# Altium PCB PCB2.0.PcbDoc (part 4 of 4)
Units mm, origin at the board's own origin, x right, y up, seen from the top; angles counter-clockwise.
Board outline 152.4 x 101.6 mm, 4 copper layers (Top Layer, Mid-Layer 1, Mid-Layer 2, Bottom Layer); 254 components, 501 nets, 1699 pads, 910 vias.
Unrouted connection lines stored in the file: 81.
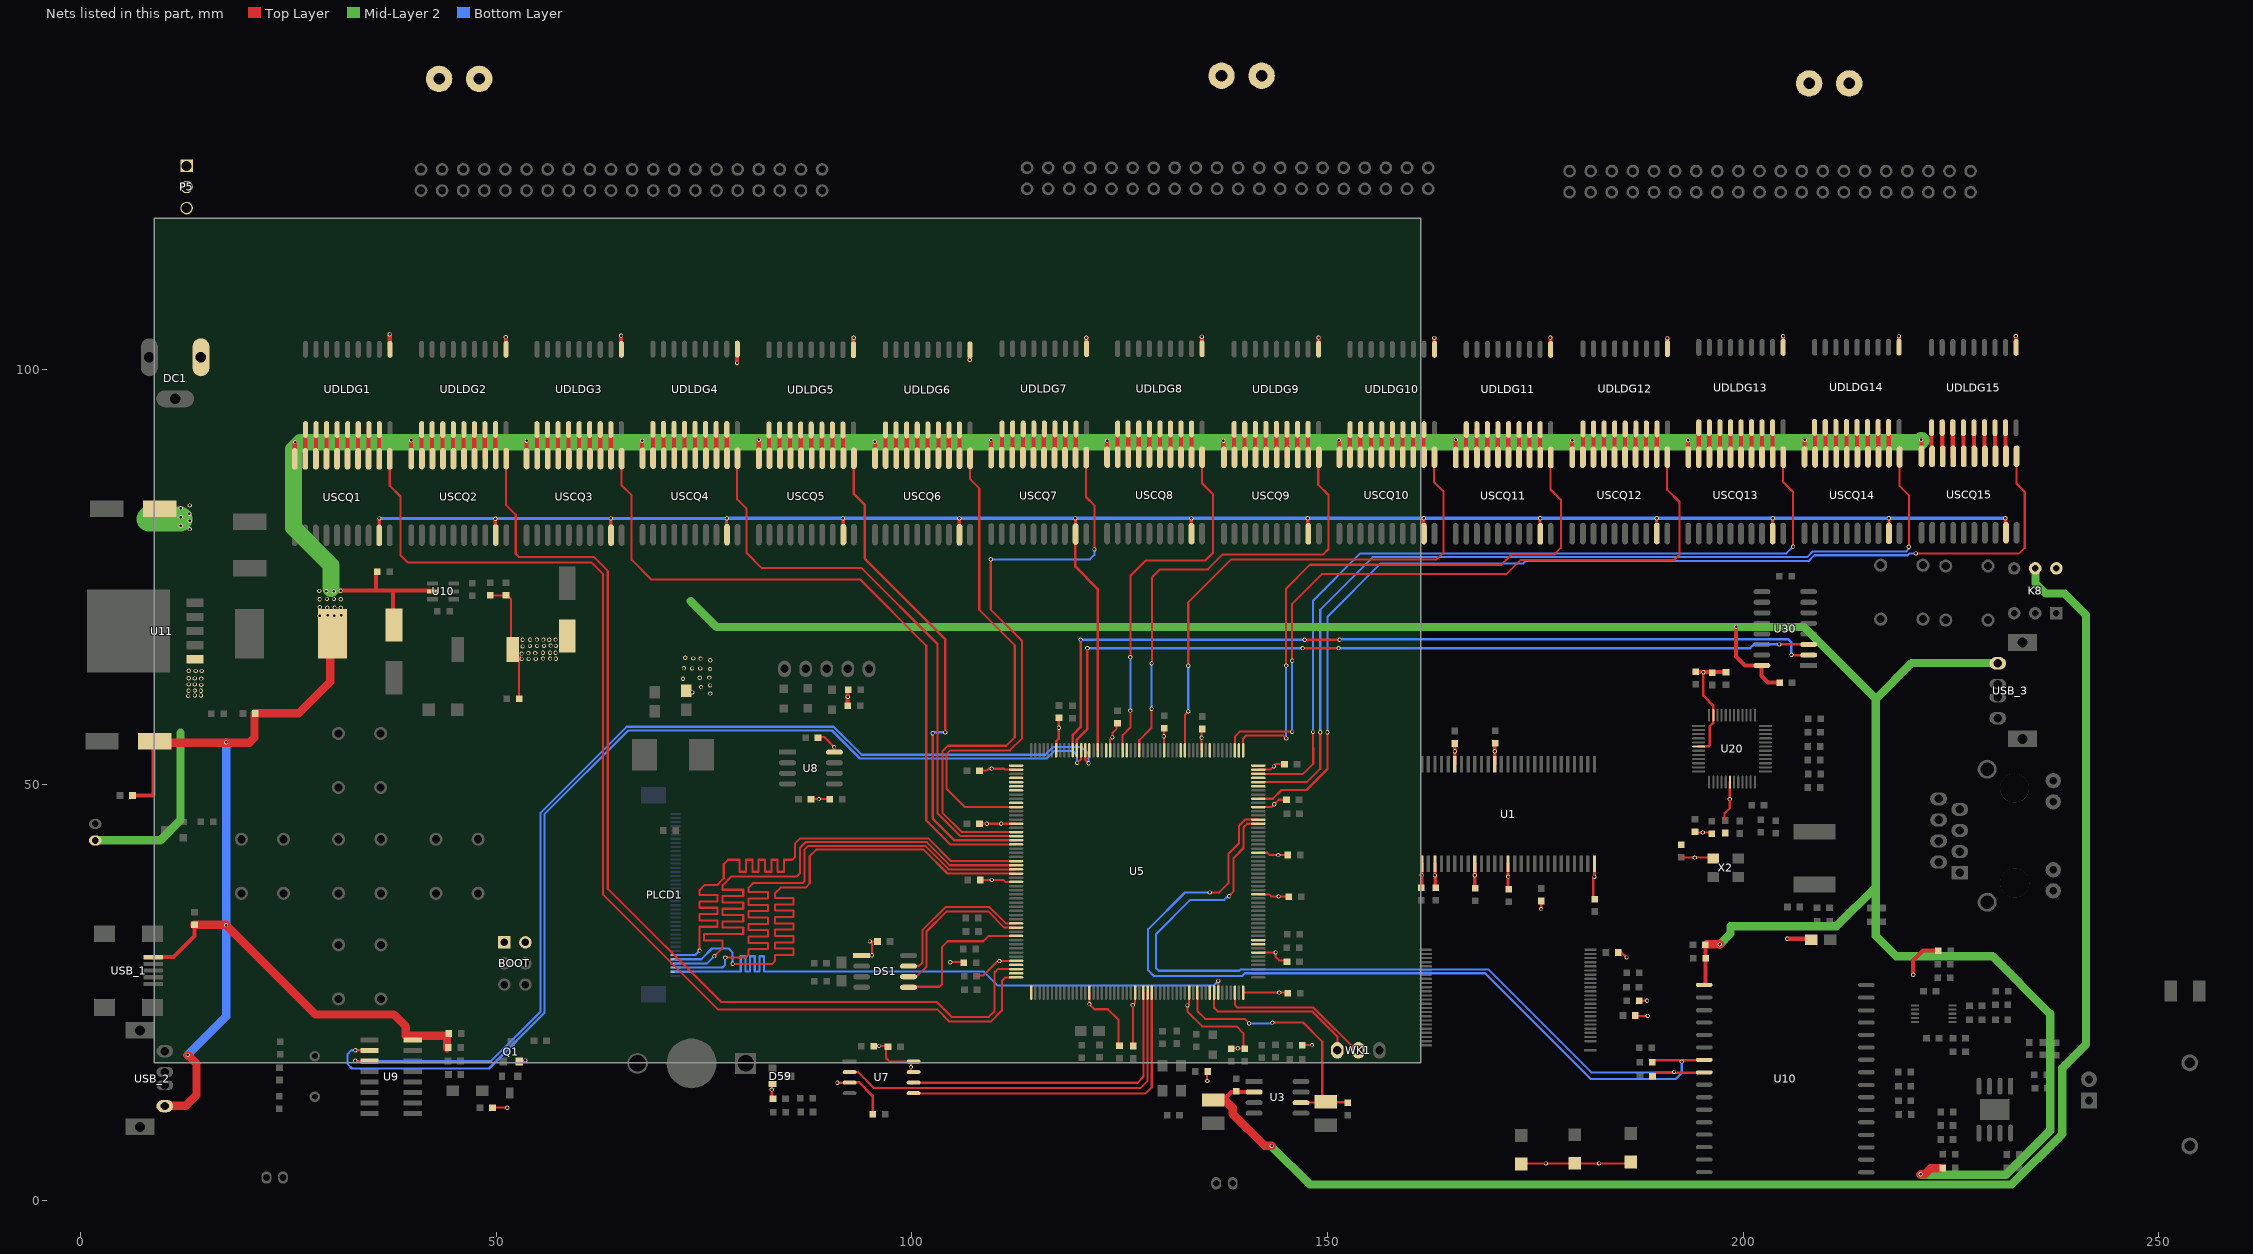
[diagram p6: the nets of this part, all layers, seen from the top]

## Via types
v1: diameter 0.5, hole 0.3, Top Layer to Bottom Layer, 910 vias

## Nets (pads, with @x,y where several pads share a name; then routed paths per layer and width w, separated by ;. In a path a pad name is that pad's centre, name@x,y a point inside that pad or via, vN(x,y) a via of type N, cw(c..) or ccw(c..) an arc to the next point about the centre after c; other vN are vias at no path point) (continued)
SCQ_D8: U5.140 USCQ1.9 USCQ2.9 USCQ3.9 USCQ4.9 USCQ5.9 USCQ6.9 USCQ7.9 USCQ8.9 USCQ9.9 USCQ10.9 USCQ11.9 USCQ12.9 USCQ13.9 USCQ14.9 USCQ15.9 | length 252.3
  Top Layer w0.3: USCQ7.9@119.67,80.1 119.67,76.255 122.35,73.575 122.35,55.082 122.353,55.079 122.353,54.149 U5.140@122.351,54.147
  Top Layer w0.4: USCQ1.9@35.895,80.1 v1@35.895,82.045 ; USCQ2.9@49.87,80.1 49.87,82.045 v1@49.875,82.05 ; USCQ3.9@63.77,80.1 v1@63.77,82.08 ; USCQ4.9@77.695,80.1 v1@77.695,82.07 ; USCQ5.9@91.72,80.1 v1@91.72,82.055 ; USCQ6.9@105.695,80.1 v1@105.695,82.07 ; USCQ7.9@119.67,80.1 v1@119.67,82.07 ; USCQ8.9@133.62,80.1 v1@133.62,82.095 ; USCQ9.9@147.62,80.1 v1@147.62,82.045 ; USCQ10.9@161.545,80.1 v1@161.545,82.07 ; USCQ11.9@175.57,80.1 v1@175.57,82.095 ; USCQ12.9@189.595,80.1 v1@189.595,82.07 ; USCQ13.9@203.545,80.125 v1@203.545,82.095 ; USCQ14.9@217.57,80.125 v1@217.57,82.055 ; USCQ15.9@231.62,80.125 v1@231.62,82.145
  Bottom Layer w0.4: v1@35.9,82.05 v1(35.925,82.05) v1@77.7,82.05 ; v1(77.725,82.05) v1@77.7,82.05 ; v1(231.55,82.075) v1(203.575,82.075) v1(189.625,82.075) v1(175.575,82.075) v1(161.575,82.075) v1(147.625,82.075) 77.725,82.075 v1@77.7,82.05
  other v1: 49.875,82.025 63.775,82.05 91.7,82.05 105.7,82.05 119.675,82.05 133.625,82.05 217.55,82.075
SCQ_LE1: U5.208 USCQ1.11 | length 136.4
  Top Layer w0.254: USCQ1.11@37.165,89.3 37.165,85.985 38.45,84.7 38.45,77.625 39.3,76.775 61.4,76.775 62.844,75.331 62.844,36.775 76.64,22.979 103.046,22.979 104.525,21.5 109.475,21.5 110.831,22.856 110.831,26.437 111.217,26.822 U5.208@112.526,26.822
SCQ_LE2: U5.206 USCQ2.11 | length 122.8
  Top Layer w0.254: USCQ2.11@51.14,89.3 51.14,83.685 52.325,82.5 52.325,77.775 52.675,77.425 61.725,77.425 63.4,75.75 63.4,37.498 77.015,23.883 102.95,23.883 104.758,22.075 109.25,22.075 109.927,22.752 109.927,27.412 110.337,27.822 U5.206@112.526,27.822
SCQ_LE3: U5.176 USCQ3.11 | length 85.5
  Top Layer w0.254: USCQ3.11@65.04,89.3 65.04,86.085 66.275,84.85 66.275,77.075 68.65,74.7 93.775,74.7 101.725,66.75 101.725,45.7 104.603,42.822 U5.176@112.526,42.822
SCQ_LE4: U5.174 USCQ4.11 | length 70.3
  Top Layer w0.254: USCQ4.11@78.965,89.3 78.965,84.36 80.1,83.225 80.1,77.9 81.925,76.075 93.95,76.075 103.079,66.946 103.079,46.579 105.836,43.822 U5.174@112.526,43.822
SCQ_LE5: U5.104
SCQ_LE6: U5.157 U5.173 USCQ6.11 | length 62.4
  Top Layer w0.254: USCQ6.11@106.965,89.3 106.965,86.81 108.1,85.675 108.1,71.05 112.375,66.775 112.375,55.725 111.35,54.7 104.325,54.7 103.698,54.073 103.698,46.6 105.975,44.322 U5.173@112.526,44.322
SCQ_LE7: U5.167 USCQ7.11 | length 71.3
  Top Layer w0.254: v1(109.475,77.15) 109.475,71.075 113.25,67.3 113.25,55.625 111.775,54.15 104.625,54.15 104.15,53.675 104.15,49.547 106.375,47.322 U5.167@112.526,47.322 ; USCQ7.11@120.94,89.3 120.94,84.635 121.95,83.625 v1(121.95,78.325) v1@121.95,78.225
  Bottom Layer w0.254: v1@109.45,77.1 109.475,77.125 121.4,77.125 121.95,77.675 v1(121.95,78.325)
SCQ_LE8: U5.134 USCQ8.11 | length 44.4
  Top Layer w0.254: U5.134@125.351,54.147 125.351,55.974 126.275,56.898 v1(126.275,58.937) ; v1(126.275,65.362) 126.275,75.125 128.15,77 135.3,77 136.225,77.925 136.225,84.975 134.89,86.31 USCQ8.11@134.89,89.3
  Bottom Layer w0.254: v1(126.275,58.937) v1(126.275,65.362)
SCQ_LE9: U5.130 USCQ9.11 | length 55.5
  Top Layer w0.254: U5.130@127.351,54.147 127.351,55.377 128.825,56.851 v1(128.825,59.162) ; v1(128.825,64.612) 128.825,64.625 128.875,64.675 128.875,74.95 129.85,75.925 135.6,75.925 137.4,77.725 149.475,77.725 150.125,78.375 150.125,84.875 148.89,86.11 USCQ9.11@148.89,89.3
  Bottom Layer w0.254: v1(128.825,59.162) v1(128.825,64.612)
SCQ_LE10: U5.119 USCQ10.11 | length 63
  Top Layer w0.254: U5.119@132.851,54.147 132.851,58.438 v1(133.25,58.837) ; v1(133.25,64.337) 133.25,71.95 138.425,77.125 163.125,77.125 163.975,77.975 163.975,85.25 162.815,86.41 USCQ10.11@162.815,89.3
  Bottom Layer w0.254: v1(133.25,58.837) v1(133.25,64.337)
SCQ_LE11: U5.105 USCQ11.11 | length 71.3
  Top Layer w0.254: U5.105@139.851,54.147 139.851,55.569 140.225,55.943 144.675,55.943 v1(145.031,55.587) ; v1(145.031,64.356) 145.031,73.631 147.875,76.475 170.925,76.475 172.15,77.7 177.25,77.7 178.075,78.525 178.075,84.3 176.84,85.535 USCQ11.11@176.84,89.3
  Bottom Layer w0.254: v1(145.031,55.587) v1(145.031,64.356)
SCQ_LE12: U5.107 USCQ12.11 | length 85.5
  Top Layer w0.254: U5.107@138.851,54.147 138.851,55.801 139.445,56.395 145.73,56.395 v1(145.75,56.375) ; v1(145.75,64.925) 145.75,71.775 149.325,75.35 171.525,75.35 173.25,77.075 191.75,77.075 192.35,77.675 192.35,84.025 190.865,85.51 USCQ12.11@190.865,89.3
  Bottom Layer w0.254: v1(145.75,56.375) v1(145.75,64.925)
SCQ_LE13: U5.102 USCQ13.11 | length 98.7
  Top Layer w0.254: U5.102@141.686,51.312 U5.102@141.676,51.322 147.072,51.322 148.287,52.537 148.287,54.412 148.275,54.425 v1(148.275,56.375) ; USCQ13.11@204.815,89.325 204.815,86.485 206,85.3 206,78.5 206.025,78.525 v1(206.025,78.675)
  Bottom Layer w0.254: v1(148.275,56.375) 148.275,72.175 153.95,77.85 205.2,77.85 v1(206.025,78.675)
SCQ_LE14: U5.100 USCQ14.11 | length 112.5
  Top Layer w0.254: U5.100@141.676,50.322 147.522,50.322 149.125,51.925 v1(149.125,56.325) ; USCQ14.11@218.84,89.325 218.84,85.935 219.95,84.825 v1@219.95,78.675
  Bottom Layer w0.254: v1(149.125,56.325) 149.125,71.075 155.448,77.398 207.723,77.398 208.4,78.075 219.625,78.075 219.95,78.4 v1(219.95,78.65)
SCQ_LE15: U5.96 USCQ15.11 | length 126.8
  Top Layer w0.254: U5.96@141.676,48.322 143.41,48.322 144.458,49.37 147.47,49.37 150,51.9 v1(150,56.325) ; v1(220.8,77.85) 233.225,77.85 233.9,78.525 233.9,85.25 232.89,86.26 USCQ15.11@232.89,89.325
  Bottom Layer w0.254: v1(150,56.325) 150,70.225 156.425,76.65 173.55,76.65 173.825,76.925 207.889,76.925 208.587,77.623 219.812,77.623 220.014,77.825 220.166,77.825 220.177,77.814 220.836,77.814 220.872,77.85 v1(220.8,77.85)
SCQ_LE16: U5.1
SCQ_LE17: U5.207
SCQ_LE18: U5.205
SCQ_LE19: U5.175 USCQ5.11 | length 60.6
  Top Layer w0.3: USCQ5.11@93.015,89.3 93.015,85.01 94.3,83.725 94.3,77.225 104,67.525 v1(104,56.3) v1@104,56.2 ; v1@102.475,56.225 v1(102.475,56.2) 102.475,45.95 105.103,43.322 U5.175@112.526,43.322
  Bottom Layer w0.3: v1(102.475,56.2) 102.575,56.3 v1(104,56.3)
SCQ_LE21: U5.160
SCQ_LE22: U5.142
SCQ_LE23: U5.138
SCQ_LE24: U5.133
SCQ_LE25: U5.120
SCQ_LE26: U5.113
SCQ_LE27: U5.106
SCQ_LE29: U5.101
SCQ_LE30: U5.99
SCQ_Q1: UDLDG1.1 USCQ1.19 | length 3.4
  Top Layer w0.5: USCQ1.19@27.005,89.3 27,89.305 27,92.7 UDLDG1.1@27.005,92.695
SCQ_Q2: UDLDG1.2 USCQ1.18 | length 3.4
  Top Layer w0.5: USCQ1.18@28.27,89.305 UDLDG1.2@28.27,92.7
SCQ_Q3: UDLDG1.3 USCQ1.17 | length 3.4
  Top Layer w0.5: USCQ1.17@29.54,89.305 UDLDG1.3@29.54,92.7
SCQ_Q4: UDLDG1.4 USCQ1.16 | length 3.4
  Top Layer w0.5: USCQ1.16@30.81,89.305 UDLDG1.4@30.81,92.7
SCQ_Q5: UDLDG1.5 USCQ1.15 | length 3.4
  Top Layer w0.5: USCQ1.15@32.08,89.305 UDLDG1.5@32.08,92.7
SCQ_Q6: UDLDG1.6 USCQ1.14 | length 3.4
  Top Layer w0.5: USCQ1.14@33.35,89.305 UDLDG1.6@33.35,92.7
SCQ_Q7: UDLDG1.7 USCQ1.13 | length 3.4
  Top Layer w0.5: USCQ1.13@34.62,89.305 UDLDG1.7@34.62,92.7
SCQ_Q8: UDLDG1.8 USCQ1.12 | length 3.4
  Top Layer w0.5: USCQ1.12@35.89,89.305 UDLDG1.8@35.89,92.7
SCQ_Q9: UDLDG2.1 USCQ2.19 | length 3.4
  Top Layer w0.5: USCQ2.19@40.975,89.305 UDLDG2.1@40.975,92.675
SCQ_Q10: UDLDG2.2 USCQ2.18 | length 3.4
  Top Layer w0.5: USCQ2.18@42.245,89.305 UDLDG2.2@42.245,92.675
SCQ_Q11: UDLDG2.3 USCQ2.17 | length 3.4
  Top Layer w0.5: USCQ2.17@43.515,89.305 UDLDG2.3@43.515,92.675
SCQ_Q12: UDLDG2.4 USCQ2.16 | length 3.4
  Top Layer w0.5: USCQ2.16@44.785,89.305 UDLDG2.4@44.785,92.675
SCQ_Q13: UDLDG2.5 USCQ2.15 | length 3.4
  Top Layer w0.5: USCQ2.15@46.055,89.305 UDLDG2.5@46.055,92.675
SCQ_Q14: UDLDG2.6 USCQ2.14 | length 3.4
  Top Layer w0.5: USCQ2.14@47.325,89.305 UDLDG2.6@47.325,92.675
SCQ_Q15: UDLDG2.7 USCQ2.13 | length 3.4
  Top Layer w0.5: USCQ2.13@48.6,89.3 48.595,89.305 48.595,92.675 UDLDG2.7@48.6,92.67
SCQ_Q16: UDLDG2.8 USCQ2.12 | length 3.4
  Top Layer w0.5: USCQ2.12@49.865,89.305 UDLDG2.8@49.865,92.675
SCQ_Q17: UDLDG3.1 USCQ3.19 | length 3.4
  Top Layer w0.5: USCQ3.19@54.875,89.305 UDLDG3.1@54.875,92.7
SCQ_Q18: UDLDG3.2 USCQ3.18 | length 3.4
  Top Layer w0.5: USCQ3.18@56.145,89.305 UDLDG3.2@56.145,92.7
SCQ_Q19: UDLDG3.3 USCQ3.17 | length 3.4
  Top Layer w0.5: USCQ3.17@57.415,89.305 UDLDG3.3@57.415,92.7
SCQ_Q20: UDLDG3.4 USCQ3.16 | length 3.4
  Top Layer w0.5: USCQ3.16@58.685,89.305 UDLDG3.4@58.685,92.7
SCQ_Q21: UDLDG3.5 USCQ3.15 | length 3.4
  Top Layer w0.5: USCQ3.15@59.955,89.305 UDLDG3.5@59.955,92.7
SCQ_Q22: UDLDG3.6 USCQ3.14 | length 3.4
  Top Layer w0.5: USCQ3.14@61.225,89.305 UDLDG3.6@61.225,92.7
SCQ_Q23: UDLDG3.7 USCQ3.13 | length 3.4
  Top Layer w0.5: USCQ3.13@62.495,89.305 UDLDG3.7@62.495,92.7
SCQ_Q24: UDLDG3.8 USCQ3.12 | length 3.4
  Top Layer w0.5: USCQ3.12@63.765,89.305 UDLDG3.8@63.765,92.7
SCQ_Q25: UDLDG4.1 USCQ4.19 | length 3.4
  Top Layer w0.5: USCQ4.19@68.825,89.32 UDLDG4.1@68.825,92.7
SCQ_Q26: UDLDG4.2 USCQ4.18 | length 3.4
  Top Layer w0.5: USCQ4.18@70.075,89.3 70.095,89.32 70.095,92.7 UDLDG4.2@70.075,92.68
SCQ_Q27: UDLDG4.3 USCQ4.17 | length 3.4
  Top Layer w0.5: USCQ4.17@71.345,89.3 71.365,89.32 71.365,92.7 UDLDG4.3@71.345,92.68
SCQ_Q28: UDLDG4.4 USCQ4.16 | length 3.4
  Top Layer w0.5: USCQ4.16@72.635,89.32 UDLDG4.4@72.635,92.7
SCQ_Q29: UDLDG4.5 USCQ4.15 | length 3.4
  Top Layer w0.5: UDLDG4.5@73.885,92.68 73.905,92.7 USCQ4.15@73.905,89.32
SCQ_Q30: UDLDG4.6 USCQ4.14 | length 3.4
  Top Layer w0.5: UDLDG4.6@75.155,92.68 75.175,92.7 USCQ4.14@75.175,89.32
SCQ_Q31: UDLDG4.7 USCQ4.13 | length 3.4
  Top Layer w0.5: USCQ4.13@76.425,89.3 76.445,89.32 UDLDG4.7@76.445,92.7
SCQ_Q32: UDLDG4.8 USCQ4.12 | length 3.4
  Top Layer w0.5: USCQ4.12@77.695,89.3 77.715,89.32 UDLDG4.8@77.715,92.7
SCQ_Q33: UDLDG5.1 USCQ5.19 | length 3.4
  Top Layer w0.5: USCQ5.19@82.8,89.33 UDLDG5.1@82.8,92.725
SCQ_Q34: UDLDG5.2 USCQ5.18 | length 3.4
  Top Layer w0.5: USCQ5.18@84.07,89.33 UDLDG5.2@84.07,92.725
SCQ_Q35: UDLDG5.3 USCQ5.17 | length 3.4
  Top Layer w0.5: USCQ5.17@85.34,89.33 UDLDG5.3@85.34,92.725
SCQ_Q36: UDLDG5.4 USCQ5.16 | length 3.4
  Top Layer w0.5: USCQ5.16@86.61,89.33 UDLDG5.4@86.61,92.725
SCQ_Q37: UDLDG5.5 USCQ5.15 | length 3.4
  Top Layer w0.5: USCQ5.15@87.88,89.33 UDLDG5.5@87.88,92.725
SCQ_Q38: UDLDG5.6 USCQ5.14 | length 3.4
  Top Layer w0.5: USCQ5.14@89.15,89.33 UDLDG5.6@89.15,92.725
SCQ_Q39: UDLDG5.7 USCQ5.13 | length 3.4
  Top Layer w0.5: USCQ5.13@90.42,89.33 UDLDG5.7@90.42,92.725
SCQ_Q40: UDLDG5.8 USCQ5.12 | length 3.4
  Top Layer w0.5: USCQ5.12@91.69,89.33 UDLDG5.8@91.69,92.725
SCQ_Q41: UDLDG6.1 USCQ6.19 | length 3.4
  Top Layer w0.5: USCQ6.19@96.825,89.32 UDLDG6.1@96.825,92.7
SCQ_Q42: UDLDG6.2 USCQ6.18 | length 3.4
  Top Layer w0.5: USCQ6.18@98.095,89.32 UDLDG6.2@98.095,92.7
SCQ_Q43: UDLDG6.3 USCQ6.17 | length 3.4
  Top Layer w0.5: USCQ6.17@99.365,89.32 UDLDG6.3@99.365,92.7
SCQ_Q44: UDLDG6.4 USCQ6.16 | length 3.4
  Top Layer w0.5: USCQ6.16@100.635,89.32 UDLDG6.4@100.635,92.7
SCQ_Q45: UDLDG6.5 USCQ6.15 | length 3.4
  Top Layer w0.5: USCQ6.15@101.885,89.3 101.885,92.68 UDLDG6.5@101.905,92.7
SCQ_Q46: UDLDG6.6 USCQ6.14 | length 3.4
  Top Layer w0.5: USCQ6.14@103.175,89.32 UDLDG6.6@103.175,92.7
SCQ_Q47: UDLDG6.7 USCQ6.13 | length 3.4
  Top Layer w0.5: USCQ6.13@104.425,89.3 104.425,92.68 UDLDG6.7@104.445,92.7
SCQ_Q48: UDLDG6.8 USCQ6.12 | length 3.4
  Top Layer w0.5: UDLDG6.8@105.695,92.68 UDLDG6.8@105.715,92.7 USCQ6.12@105.715,89.32
SCQ_Q49: UDLDG7.1 USCQ7.19 | length 3.4
  Top Layer w0.5: USCQ7.19@110.825,89.345 UDLDG7.1@110.825,92.7
SCQ_Q50: UDLDG7.2 USCQ7.18 | length 3.4
  Top Layer w0.5: USCQ7.18@112.05,89.3 112.095,89.345 UDLDG7.2@112.095,92.7
SCQ_Q51: UDLDG7.3 USCQ7.17 | length 3.4
  Top Layer w0.5: USCQ7.17@113.365,89.345 UDLDG7.3@113.365,92.7
SCQ_Q52: UDLDG7.4 USCQ7.16 | length 3.4
  Top Layer w0.5: USCQ7.16@114.59,89.3 114.635,89.345 UDLDG7.4@114.635,92.7
SCQ_Q53: UDLDG7.5 USCQ7.15 | length 3.4
  Top Layer w0.5: USCQ7.15@115.86,89.3 115.86,92.655 UDLDG7.5@115.905,92.7
SCQ_Q54: UDLDG7.6 USCQ7.14 | length 3.4
  Top Layer w0.5: USCQ7.14@117.175,89.345 UDLDG7.6@117.175,92.7
SCQ_Q55: UDLDG7.7 USCQ7.13 | length 3.4
  Top Layer w0.5: USCQ7.13@118.445,89.345 UDLDG7.7@118.445,92.7
SCQ_Q56: UDLDG7.8 USCQ7.12 | length 3.4
  Top Layer w0.5: USCQ7.12@119.715,89.345 UDLDG7.8@119.715,92.7
SCQ_Q57: UDLDG8.1 USCQ8.19 | length 3.4
  Top Layer w0.5: USCQ8.19@124.75,89.32 UDLDG8.1@124.75,92.7
SCQ_Q58: UDLDG8.2 USCQ8.18 | length 3.4
  Top Layer w0.5: USCQ8.18@126.02,89.32 UDLDG8.2@126.02,92.7
SCQ_Q59: UDLDG8.3 USCQ8.17 | length 3.4
  Top Layer w0.5: USCQ8.17@127.29,89.32 UDLDG8.3@127.29,92.7
SCQ_Q60: UDLDG8.4 USCQ8.16 | length 3.4
  Top Layer w0.5: USCQ8.16@128.56,89.32 UDLDG8.4@128.56,92.7
SCQ_Q61: UDLDG8.5 USCQ8.15 | length 3.4
  Top Layer w0.5: USCQ8.15@129.83,89.32 UDLDG8.5@129.83,92.7
SCQ_Q62: UDLDG8.6 USCQ8.14 | length 3.4
  Top Layer w0.5: USCQ8.14@131.1,89.32 UDLDG8.6@131.1,92.7
SCQ_Q63: UDLDG8.7 USCQ8.13 | length 3.4
  Top Layer w0.5: USCQ8.13@132.37,89.32 UDLDG8.7@132.37,92.7
SCQ_Q64: UDLDG8.8 USCQ8.12 | length 3.4
  Top Layer w0.5: USCQ8.12@133.64,89.32 UDLDG8.8@133.64,92.7
SCQ_Q65: UDLDG9.1 USCQ9.19 | length 3.4
  Top Layer w0.5: USCQ9.19@138.75,89.32 UDLDG9.1@138.75,92.7
SCQ_Q66: UDLDG9.2 USCQ9.18 | length 3.4
  Top Layer w0.5: USCQ9.18@140.02,89.32 UDLDG9.2@140.02,92.7
SCQ_Q67: UDLDG9.3 USCQ9.17 | length 3.4
  Top Layer w0.5: USCQ9.17@141.29,89.32 UDLDG9.3@141.29,92.7
SCQ_Q68: UDLDG9.4 USCQ9.16 | length 3.4
  Top Layer w0.5: USCQ9.16@142.56,89.32 UDLDG9.4@142.56,92.7
SCQ_Q69: UDLDG9.5 USCQ9.15 | length 3.4
  Top Layer w0.5: USCQ9.15@143.83,89.32 UDLDG9.5@143.83,92.7
SCQ_Q70: UDLDG9.6 USCQ9.14 | length 3.4
  Top Layer w0.5: USCQ9.14@145.1,89.32 UDLDG9.6@145.1,92.7
SCQ_Q71: UDLDG9.7 USCQ9.13 | length 3.4
  Top Layer w0.5: USCQ9.13@146.37,89.32 UDLDG9.7@146.37,92.7
SCQ_Q72: UDLDG9.8 USCQ9.12 | length 3.4
  Top Layer w0.5: USCQ9.12@147.64,89.32 UDLDG9.8@147.64,92.7
SCQ_Q73: UDLDG10.1 USCQ10.19 | length 3.4
  Top Layer w0.5: USCQ10.19@152.675,89.32 UDLDG10.1@152.675,92.675
SCQ_Q74: UDLDG10.2 USCQ10.18 | length 3.4
  Top Layer w0.5: USCQ10.18@153.945,89.32 UDLDG10.2@153.945,92.675
SCQ_Q75: UDLDG10.3 USCQ10.17 | length 3.4
  Top Layer w0.5: USCQ10.17@155.215,89.32 UDLDG10.3@155.215,92.675
SCQ_Q76: UDLDG10.4 USCQ10.16 | length 3.4
  Top Layer w0.5: USCQ10.16@156.485,89.32 UDLDG10.4@156.485,92.675
SCQ_Q77: UDLDG10.5 USCQ10.15 | length 3.4
  Top Layer w0.5: USCQ10.15@157.755,89.32 UDLDG10.5@157.755,92.675
SCQ_Q78: UDLDG10.6 USCQ10.14 | length 3.4
  Top Layer w0.5: USCQ10.14@159.025,89.32 UDLDG10.6@159.025,92.675
SCQ_Q79: UDLDG10.7 USCQ10.13 | length 3.4
  Top Layer w0.5: USCQ10.13@160.295,89.32 UDLDG10.7@160.295,92.675
SCQ_Q80: UDLDG10.8 USCQ10.12 | length 3.4
  Top Layer w0.5: USCQ10.12@161.565,89.32 UDLDG10.8@161.565,92.675
SCQ_Q81: UDLDG11.1 USCQ11.19 | length 3.4
  Top Layer w0.5: USCQ11.19@166.675,89.305 UDLDG11.1@166.675,92.675
SCQ_Q82: UDLDG11.2 USCQ11.18 | length 3.4
  Top Layer w0.5: USCQ11.18@167.945,89.305 UDLDG11.2@167.945,92.675
SCQ_Q83: UDLDG11.3 USCQ11.17 | length 3.4
  Top Layer w0.5: USCQ11.17@169.215,89.305 UDLDG11.3@169.215,92.675
SCQ_Q84: UDLDG11.4 USCQ11.16 | length 3.4
  Top Layer w0.5: USCQ11.16@170.485,89.305 UDLDG11.4@170.485,92.675
SCQ_Q85: UDLDG11.5 USCQ11.15 | length 3.4
  Top Layer w0.5: USCQ11.15@171.755,89.305 UDLDG11.5@171.755,92.675
SCQ_Q86: UDLDG11.6 USCQ11.14 | length 3.4
  Top Layer w0.5: USCQ11.14@173.025,89.305 UDLDG11.6@173.025,92.675
SCQ_Q87: UDLDG11.7 USCQ11.13 | length 3.4
  Top Layer w0.5: USCQ11.13@174.295,89.305 UDLDG11.7@174.295,92.675
SCQ_Q88: UDLDG11.8 USCQ11.12 | length 3.4
  Top Layer w0.5: USCQ11.12@175.565,89.305 UDLDG11.8@175.565,92.675
SCQ_Q89: UDLDG12.1 USCQ12.19 | length 3.4
  Top Layer w0.5: USCQ12.19@180.725,89.32 UDLDG12.1@180.725,92.675
SCQ_Q90: UDLDG12.2 USCQ12.18 | length 3.4
  Top Layer w0.5: USCQ12.18@181.995,89.32 UDLDG12.2@181.995,92.675
SCQ_Q91: UDLDG12.3 USCQ12.17 | length 3.4
  Top Layer w0.5: USCQ12.17@183.265,89.32 UDLDG12.3@183.265,92.675
SCQ_Q92: UDLDG12.4 USCQ12.16 | length 3.4
  Top Layer w0.5: USCQ12.16@184.535,89.32 UDLDG12.4@184.535,92.675
SCQ_Q93: UDLDG12.5 USCQ12.15 | length 3.4
  Top Layer w0.5: USCQ12.15@185.805,89.32 UDLDG12.5@185.805,92.675
SCQ_Q94: UDLDG12.6 USCQ12.14 | length 3.4
  Top Layer w0.5: USCQ12.14@187.075,89.32 UDLDG12.6@187.075,92.675
SCQ_Q95: UDLDG12.7 USCQ12.13 | length 3.4
  Top Layer w0.5: USCQ12.13@188.345,89.32 UDLDG12.7@188.345,92.675
SCQ_Q96: UDLDG12.8 USCQ12.12 | length 3.4
  Top Layer w0.5: USCQ12.12@189.615,89.32 UDLDG12.8@189.615,92.675
SCQ_Q97: UDLDG13.1 USCQ13.19 | length 3.4
  Top Layer w0.5: UDLDG13.1@194.655,92.655 194.675,92.675 USCQ13.19@194.675,89.345
SCQ_Q98: UDLDG13.2 USCQ13.18 | length 3.3
  Top Layer w0.5: USCQ13.18@195.945,89.345 UDLDG13.2@195.945,92.675
SCQ_Q99: UDLDG13.3 USCQ13.17 | length 3.3
  Top Layer w0.5: USCQ13.17@197.215,89.345 UDLDG13.3@197.215,92.675
SCQ_Q100: UDLDG13.4 USCQ13.16 | length 3.3
  Top Layer w0.5: USCQ13.16@198.485,89.345 UDLDG13.4@198.485,92.675
SCQ_Q101: UDLDG13.5 USCQ13.15 | length 3.3
  Top Layer w0.5: USCQ13.15@199.755,89.345 UDLDG13.5@199.755,92.675
SCQ_Q102: UDLDG13.6 USCQ13.14 | length 3.3
  Top Layer w0.5: USCQ13.14@201.025,89.345 UDLDG13.6@201.025,92.675
SCQ_Q103: UDLDG13.7 USCQ13.13 | length 3.3
  Top Layer w0.5: USCQ13.13@202.295,89.345 UDLDG13.7@202.295,92.675
SCQ_Q104: UDLDG13.8 USCQ13.12 | length 3.4
  Top Layer w0.5: USCQ13.12@203.545,89.325 203.545,92.655 UDLDG13.8@203.565,92.675
SCQ_Q105: UDLDG14.1 USCQ14.19 | length 3.3
  Top Layer w0.5: USCQ14.19@208.65,89.355 UDLDG14.1@208.65,92.675
SCQ_Q106: UDLDG14.2 USCQ14.18 | length 3.3
  Top Layer w0.5: USCQ14.18@209.92,89.355 UDLDG14.2@209.92,92.675
SCQ_Q107: UDLDG14.3 USCQ14.17 | length 3.3
  Top Layer w0.5: USCQ14.17@211.19,89.355 UDLDG14.3@211.19,92.675
SCQ_Q108: UDLDG14.4 USCQ14.16 | length 3.3
  Top Layer w0.5: USCQ14.16@212.46,89.355 UDLDG14.4@212.46,92.675
SCQ_Q109: UDLDG14.5 USCQ14.15 | length 3.3
  Top Layer w0.5: USCQ14.15@213.73,89.355 UDLDG14.5@213.73,92.675
SCQ_Q110: UDLDG14.6 USCQ14.14 | length 3.3
  Top Layer w0.5: USCQ14.14@215,89.355 UDLDG14.6@215,92.675
SCQ_Q111: UDLDG14.7 USCQ14.13 | length 3.4
  Top Layer w0.5: USCQ14.13@216.3,89.325 216.27,89.355 216.27,92.675 UDLDG14.7@216.3,92.645
SCQ_Q112: UDLDG14.8 USCQ14.12 | length 3.4
  Top Layer w0.5: UDLDG14.8@217.54,92.675 217.54,89.355 USCQ14.12@217.57,89.325
SCQ_Q113: UDLDG15.1 USCQ15.19 | length 3.3
  Top Layer w0.5: USCQ15.19@222.7,89.355 UDLDG15.1@222.7,92.65
SCQ_Q114: UDLDG15.2 USCQ15.18 | length 3.3
  Top Layer w0.5: USCQ15.18@223.97,89.355 UDLDG15.2@223.97,92.65
SCQ_Q115: UDLDG15.3 USCQ15.17 | length 3.3
  Top Layer w0.5: USCQ15.17@225.24,89.355 UDLDG15.3@225.24,92.65
SCQ_Q116: UDLDG15.4 USCQ15.16 | length 3.3
  Top Layer w0.5: USCQ15.16@226.51,89.355 UDLDG15.4@226.51,92.65
SCQ_Q117: UDLDG15.5 USCQ15.15 | length 3.3
  Top Layer w0.5: USCQ15.15@227.78,89.355 UDLDG15.5@227.78,92.65
SCQ_Q118: UDLDG15.6 USCQ15.14 | length 3.3
  Top Layer w0.5: USCQ15.14@229.05,89.355 UDLDG15.6@229.05,92.65
SCQ_Q119: UDLDG15.7 USCQ15.13 | length 3.3
  Top Layer w0.5: USCQ15.13@230.32,89.355 UDLDG15.7@230.32,92.65
SCQ_Q120: UDLDG15.8 USCQ15.12 | length 3.3
  Top Layer w0.5: USCQ15.12@231.59,89.355 UDLDG15.8@231.59,92.65
SDIO_CK: U5.163
SDIO_CMD: U5.166
SDIO_D2: U5.161
SDIO_D3: U5.162
SPEED: U5.62
SPI5_MISO: U5.29 U7.2 | length 47.9
  Top Layer w0.254: U7.2@92.171,15.416 93.521,15.416 95.426,13.511 127.475,13.511 128.351,14.387 U5.29@128.351,24.997
SPI5_MOSI: U5.30 U7.5 | length 40.9
  Top Layer w0.254: U7.5@100.006,13.011 99.871,12.876 128.115,12.876 128.851,13.612 U5.30@128.851,24.997
SPI5_SCK: U5.28 U7.6 | length 38.6
  Top Layer w0.254: U7.6@100.006,14.011 99.871,14.146 127.16,14.146 127.851,14.837 U5.28@127.851,24.997
TP_CS: PLCD1.35 U5.180 | length 78.7
  Top Layer w0.254: v1(74.45,30.062) 74.45,32.921 76.624,32.921 76.624,33.683 74.45,33.683 74.45,34.445 76.624,34.445 76.624,35.207 74.45,35.207 74.45,35.969 76.624,35.969 76.624,36.731 74.45,36.731 74.45,37.337 75.068,37.955 76.568,37.955 77.35,38.737 77.35,40.462 77.875,40.987 79.268,40.987 79.268,39.539 80.03,39.539 80.03,40.987 80.792,40.987 80.792,39.539 81.554,39.539 81.554,40.987 82.316,40.987 82.316,39.539 83.078,39.539 83.078,40.987 83.84,40.987 83.84,39.539 84.602,39.539 84.602,40.987 85.575,40.987 85.95,41.362 85.95,42.962 86.548,43.56 101.963,43.56 104.7,40.822 U5.180@112.526,40.822
  Bottom Layer w0.254: PLCD1.35@71.575,29.512 73.9,29.512 v1(74.45,30.062)
TP_MISO: PLCD1.37 U5.181 | length 78.7
  Top Layer w0.254: v1(76.225,29.387) 77.225,30.387 77.225,31.285 74.961,31.285 74.961,32.047 79.706,32.047 79.706,32.809 77.225,32.809 77.225,33.571 79.706,33.571 79.706,34.333 77.225,34.333 77.225,35.095 79.706,35.095 79.706,35.857 77.225,35.857 77.225,36.619 79.706,36.619 79.706,37.381 77.225,37.381 77.225,37.912 78.275,38.962 86.125,38.962 86.55,39.387 86.55,42.462 87.196,43.108 101.775,43.108 104.561,40.322 U5.181@112.526,40.322
  Bottom Layer w0.254: PLCD1.37@71.575,28.512 75.35,28.512 v1(76.225,29.387)
TP_MOSI: PLCD1.36 U5.183 | length 78.7
  Top Layer w0.254: v1(78.425,28.462) 83.175,28.462 83.525,28.812 83.525,29.523 85.736,29.523 85.736,30.285 83.525,30.285 83.525,31.047 85.736,31.047 85.736,31.809 83.525,31.809 83.525,32.571 85.736,32.571 85.736,33.333 83.525,33.333 83.525,34.095 85.736,34.095 85.736,34.857 83.525,34.857 83.525,35.619 85.736,35.619 85.736,36.381 83.525,36.381 83.525,36.962 84.2,37.637 87.2,37.637 87.7,38.137 87.7,41.437 88.467,42.204 101.401,42.204 104.282,39.322 U5.183@112.526,39.322
  Bottom Layer w0.254: PLCD1.36@71.575,29.012 74.65,29.012 75.937,30.299 77.938,30.299 78.425,29.812 v1(78.425,28.462)
TP_PEN: PLCD1.39 U5.46 | length 78.7
  Top Layer w0.254: U5.46@136.851,24.997 v1(136.851,26.411)
  Bottom Layer w0.254: PLCD1.39@71.575,27.512 73.35,27.512 73.354,27.516 79.404,27.516 79.404,29.369 79.963,29.369 79.963,27.516 80.522,27.516 80.522,29.369 81.081,29.369 81.081,27.516 81.64,27.516 81.64,29.369 82.198,29.369 82.198,27.516 108.646,27.516 110.323,25.839 136.279,25.839 v1(136.851,26.411)
TP_SCK: PLCD1.38 U5.182 | length 78.7
  Top Layer w0.254: v1(77.525,29.212) 79.975,29.212 80.35,29.587 80.35,30.223 82.66,30.223 82.66,30.985 80.35,30.985 80.35,31.747 82.66,31.747 82.66,32.509 80.35,32.509 80.35,33.271 82.66,33.271 82.66,34.033 80.35,34.033 80.35,34.795 82.66,34.795 82.66,35.557 80.35,35.557 80.35,36.319 82.66,36.319 82.66,37.081 80.35,37.081 80.35,37.637 80.9,38.187 86.85,38.187 87.05,38.387 87.05,42.187 87.519,42.656 101.588,42.656 104.422,39.822 U5.182@112.526,39.822
  Bottom Layer w0.254: PLCD1.38@71.575,28.012 77.2,28.012 77.525,28.337 v1(77.525,29.212)
USART1_RX: U5.144 U9.2 | length 127.3
  Top Layer w0.254: v1(33.025,18.062) U9.2@34.525,18.062 ; v1(119.875,52.637) 120.351,53.113 U5.144@120.351,54.147
  Bottom Layer w0.254: v1(33.025,18.062) 32.55,18.062 32.1,17.612 32.1,16.387 32.625,15.862 49.1,15.862 55.775,22.537 55.775,46.462 65.85,56.537 90.375,56.537 93.75,53.162 116.232,53.162 117.159,54.089 119.323,54.089 119.875,53.537 v1(119.875,52.637)
USART1_TX: U5.143 U9.3 | length 125.4
  Top Layer w0.254: v1(33.005,16.792) U9.3@34.525,16.792 ; U5.143@120.851,54.147 120.851,52.986 v1(121.25,52.587)
  Bottom Layer w0.254: v1(33.005,16.792) 49.391,16.792 55.323,22.724 55.323,46.649 65.663,56.989 90.562,56.989 93.937,53.614 116.045,53.614 116.972,54.541 120.447,54.541 121.25,53.738 v1(121.25,52.587)
USART2_RX: U5.50 WK1.2 | length 18.8
  Top Layer w0.254: U5.50@138.851,24.997 138.851,23.522 139.175,23.198 148.325,23.198 153.765,17.758 WK1.2@153.765,17.737
USART2_TX: U5.45 WK1.1 | length 20.1
  Top Layer w0.254: U5.45@136.351,24.997 136.351,23.169 136.775,22.745 148.138,22.745 151.225,19.658 WK1.1@151.225,17.737
USART3_RX: R25.1 U5.91 U10.7 | length 104.7
  Top Layer w0.254: v1(135.825,37.05) 136.9,37.05 136.937,37.013 138.075,38.15 138.075,41.675 139.35,42.95 139.35,45.075 140.097,45.822 U5.91@141.676,45.822 ; R25.1@189.025,16.65 189.23,16.855 U10.7@195.035,16.855
  Bottom Layer w0.254: v1(135.825,37.05) 132.85,37.05 128.425,32.625 128.425,27.675 129.1,27 139.752,27 140.077,27.325 168.95,27.325 181.675,14.6 191.9,14.6 192.625,15.325 v1(192.625,16.7)
USART3_TX: R24.1 U5.90 U10.8 | length 99.5
  Top Layer w0.254: v1@138.15,36.625 138.7,37.175 138.7,41.2 139.9,42.4 139.9,44.875 140.347,45.322 U5.90@141.676,45.322 ; R24.1@189.05,14.925 189.48,15.355 U10.8@195.035,15.355
  Bottom Layer w0.254: v1(138.15,36.6) 138.025,36.6 137.575,36.15 133.475,36.15 129.375,32.05 129.375,27.925 129.675,27.625 139.4,27.625 139.575,27.8 169.35,27.8 181.75,15.4 v1@191.7,15.4
  other v1: 191.7,15.45
USB_DM: U5.145 U30.3 | length 99.9
  Top Layer w0.3: U5.145@119.851,54.147 119.851,55.451 121.1,56.7 v1(121.1,66.45) ; v1(147,66.45) v1(151.325,66.45) ; v1@204.325,66.89 U30.3@207.9,66.89
  Bottom Layer w0.3: v1(121.1,66.45) v1(147,66.45) v1@147.05,66.45 ; v1(151.325,66.45) 200.875,66.45 201.325,66.9 v1(204.375,66.9)
USB_DP: U5.146 U30.2 | length 103.1
  Top Layer w0.3: U5.146@119.351,54.147 119.351,56.001 120.3,56.95 v1(120.3,67.475) ; v1(147.25,67.45) v1(151.45,67.45) v1@151.525,67.45 ; v1@205.805,65.62 U30.2@207.9,65.62 U30.2@207.88,65.6
  Bottom Layer w0.3: v1(120.3,67.475) v1@147.275,67.475 ; v1(151.45,67.45) 151.498,67.498 205.452,67.498 205.825,67.125 v1(205.825,65.65)
V3.3V: *R48.2 BOOT.1 BOOT.2 C2.2 C3.2 C6.2 C7.2 C8.2 C9.2 C10.2 C11.2 C12.2 C14.2 C15.2 C27.2 C28.2 C29.2 C30.2 C31.2 C32.2 C33.2 C34.2 C35.2 C36.2 C37.2 C38.2 C39.2 C40.2 C41.2 C42.2 C43.2 C60.2 C61.2 C62.2 C73.1 CE5.1 D59.2 DS1.1 FB1.2 FB6.1 FB10.1 L1.1 L3.2 LED1.1 LED2.1 LED3.1 Q1.1 R1.1 R6.2 R7.2 R8.2 R9.2 R12.1 R13.1 R14.1 R17.1 R18.1 R23.1 R27.1 R39.1 R40.1 R47.2 R56.1 R57.1 U1.1 U1.3 U1.9 U1.14 U1.27 U1.43 U1.49 U5.15 U5.26 U5.39 U5.52 U5.59 U5.73 U5.83 U5.94 U5.103 U5.115 U5.124 U5.137 U5.150 U5.158 U5.171 U5.185 U5.204 U7.3 U7.7 U7.8 U8.8 U20.23 U20.30 U20.42 X2.4 | length 203.1
  Top Layer w0.254: R23.1@49.475,11.175 v1@51.35,11.175 ; R57.1@49.5,72.8 51.325,72.8 51.775,72.35 L3.2@51.775,66.325 ; Q1.1@52.625,16.839 v1(53.498,16.839) ; C73.1@52.725,60.15 52.725,65.325 52.85,65.45 ; R18.1@83.13,12.12 v1(83.13,13.332) D59.2@83.13,14.151 ; R12.1@87.775,48.3 R13.1@89.9,48.3 ; C14.2@88.575,55.75 89.425,55.75 v1(90.632,54.544) U8.8@90.632,53.957 ; v1(91.034,14.146) U7.3@92.171,14.146 ; DS1.1@93.65,29.487 v1(95.175,29.487) 95.175,30.937 v1(94.95,31.162) C3.2@95.675,31.162 ; R14.1@95.184,18.584 v1(96.05,18.584) C15.2@96.769,18.584 ; C15.2@96.875,18.575 96.875,17.125 97.314,16.686 99.871,16.686 U7.7@99.871,15.416 ; v1@104.5,28.675 R17.1@106.05,28.675 ; 107.675,27.05 108.575,27.05 110.325,28.8 v1(110.525,28.8) ; C28.2@108.205,38.569 110.993,38.569 111.24,38.322 U5.185@112.526,38.322 ; C29.2@108.205,45.313 v1(109.024,45.313) 109.034,45.322 111.16,45.322 ; C30.2@108.205,51.726 109.011,51.726 109.222,51.937 111.075,51.937 111.19,51.822 U5.158@112.526,51.822 ; v1@110.525,28.822 U5.204@112.526,28.822 ; v1(110.725,45.325) 111.158,45.325 111.16,45.322 ; U5.171@112.526,45.322 111.16,45.322 ; U5.15@121.351,24.997 v1(121.351,23.611) 121.962,23 123.575,23 124.875,21.7 124.875,18.875 C42.2@124.975,18.775 ; U5.137@123.851,54.147 123.851,55.437 v1@124.1,55.686 ; v1(124.125,55.712) 124.125,56.25 124.625,56.75 C32.2@124.625,57.6 ; C43.2@126.6,18.8 126.575,18.825 v1(126.575,23.487) 126.851,23.763 U5.26@126.851,24.997 ; v1(130.325,55.85) C33.2@130.325,57.1 ; v1@130.326,55.849 130.326,54.172 U5.124@130.351,54.147 ; U5.39@133.351,24.997 133.351,23.663 v1(133.15,23.462) 133.15,22.698 134.911,20.937 139.063,20.937 139.875,20.125 C41.2@139.875,18.275 ; C34.2@134.85,56.95 v1(134.85,55.675) 134.85,54.178 134.835,54.163 U5.115@134.851,54.147 ; v1(135.525,14.362) L1.1@135.525,15.725 ; R1.1@138.7,18.275 C41.2@139.875,18.275 ; U5.52@139.851,24.997 v1(144.2,24.997) C40.2@144.91,24.997 ; C41.2@139.875,18.25 C41.2@139.875,18.275 ; U5.59@141.676,29.822 v1@143.75,29.822 ; U5.73@141.676,36.822 142.965,36.822 143.212,36.575 v1(144.125,36.575) C38.2@145.032,36.575 ; U5.83@141.676,41.822 142.765,41.822 143.021,41.566 145.032,41.566 C37.2@144.961,41.637 ; U5.94@141.676,47.322 143.26,47.322 v1(143.6,47.662) 144.138,48.2 C36.2@144.875,48.2 ; U5.103@141.676,51.822 143.122,51.822 143.8,52.5 C35.2@144.675,52.5 ; v1(143.75,29.825) v1@143.75,29.822 ; C39.2@145.075,28.875 144.2,28.875 143.75,29.325 v1@143.75,29.822 ; FB6.1@146.875,18.675 v1@148.15,18.675 ; LED1.1@173.225,4.45 LED3.1@186.275,4.45 ; v1@175.725,35.025 R6.2@175.725,36.112 ; R7.2@187.275,22.2 v1@188.55,22.2 ; 192.55,41.3 192.575,41.275 X2.4@196.425,41.275 ; R39.1@194.28,44.28 R40.1@196.08,44.28 ; 197.775,45.775 197.775,46.575 198.4,47.2 v1(198.4,48.275) U20.42@198.4,50.35
  Top Layer w0.3: U7.3@92.473,14.192 93.658,14.192 95.275,12.575 C27.2@95.275,10.375 ; U5.150@117.351,54.147 117.351,55.226 117.675,55.55 v1(117.675,56.875) C31.2@117.675,57.85 ; v1(182.128,38.915) 181.952,38.739 181.952,36.348 C6.2@182.2,36.1 ; R9.2@184.95,29.85 185.35,29.85 v1@185.975,29.225 ; R8.2@187.475,24.025 v1@188.475,24.025 ; U20.30@194.625,54.625 195.825,54.625 196.025,54.825 196.025,57.05 196.4,57.425 196.4,59.55 195.225,60.725 v1@195.225,63.575
  Top Layer w0.4: C7.2@161.325,37.612 v1@161.325,39.137 ; C7.2@161.327,37.51 C7.2@161.327,37.612 ; v1(161.327,39.139) U1.1@161.327,40.487 ; v1(162.927,39.11) U1.3@162.927,40.487 ; C11.2@162.95,37.612 v1@162.95,39.087 ; U1.49@165.327,52.487 v1(165.327,54.037) C9.2@165.327,54.987 ; C12.2@167.725,37.612 v1@167.725,39.112 ; v1(167.727,39.114) U1.9@167.727,40.487 ; U1.43@170.128,52.487 v1(170.128,54.037) C8.2@170.128,54.987 ; C10.2@171.728,37.615 v1(171.728,38.962) U1.14@171.728,40.487 ; v1(182.128,38.915) U1.27@182.128,40.487 U1.27@182.13,40.484
  Top Layer w0.5: C61.2@194.15,63.575 195.225,63.575 R47.2@197.86,63.575 ; v1(205.3,31.475) FB10.1@207.775,31.475 ; v1@220.45,27.125 220.45,28.85 221.675,30.075 R27.1@223.275,30.075
  Top Layer w0.508: C2.2@92.259,59.885 FB1.2@92.259,61.307
  other v1: 176.275,4.45 182.675,4.45 51.3,11.15 99.875,16.037 139.2,18.3 148.125,18.675 188.525,22.2 188.45,24.025 220.475,27.15 104.6,28.65 186,29.225 175.7,35.05 109.6,38.55 194.2,41.25 144.075,41.537 195.15,44.275 88.8,48.275 109.575,51.95 143.55,52.225 92.275,60.587 195.225,63.55 53.025,65.15 53.875,65.15 54.725,65.15 57.15,65.175 55.625,65.2 56.45,65.2 53.025,65.8 53.85,65.85 54.675,65.85 55.6,65.9 56.45,65.9 57.125,65.9 53.15,66.65 54.025,66.725 54.9,66.725 55.725,66.725 57.15,66.725 56.525,66.75 53.15,67.45 54.05,67.45 56.35,67.45 54.875,67.475 55.65,67.475 57.125,67.475
V5V: C44.2 C45.2 C71.1 C78.1 C79.1 C83.2 C100.2 CE3.1 CE4.1 FB8.1 L2.1 R36.2 R53.2 R54.2 U9.16 U10.1@195.325,25.925 U10.5@42.31,73.265 U30.16 USB_1.1 USB_2.1 USB_3.1 USCQ1.20 USCQ2.20 USCQ3.20 USCQ4.20 USCQ5.20 USCQ6.20 USCQ7.20 USCQ8.20 USCQ9.20 USCQ10.20 USCQ11.20 USCQ12.20 USCQ13.20 USCQ14.20 USCQ15.20 | length 689
  Top Layer w0.5: C71.1@6.209,48.7 8.575,48.7 8.675,48.8 8.75,48.8 CE3.1@8.75,55.075 ; USB_1.1@8.675,29.275 11.125,29.275 13.65,31.8 C83.2@13.65,33.175 ; USCQ1.20@25.735,89.3 v1@25.735,91.285 ; v1@31.265,73.365 35.525,73.365 ; R54.2@35.525,75.75 35.525,73.365 ; CE4.1@37.575,69.45 37.575,73.365 ; USCQ2.20@39.71,89.3 v1@39.71,91.49 ; U10.5@42.11,73.34 42.085,73.365 37.575,73.365 ; USCQ3.20@53.61,89.3 v1@53.61,91.39 ; USCQ4.20@67.535,89.3 v1@67.535,91.435 ; USCQ5.20@81.56,89.3 v1@81.56,91.54 ; USCQ6.20@95.535,89.3 v1@95.535,91.265 ; USCQ7.20@109.51,89.3 v1@109.51,91.465 ; USCQ8.20@123.46,89.3 v1@123.46,91.435 ; USCQ9.20@137.46,89.3 v1@137.46,91.41 ; USCQ10.20@151.385,89.3 v1@151.385,91.51 ; USCQ11.20@165.41,89.3 v1@165.41,91.61 ; USCQ12.20@179.435,89.3 v1@179.435,91.485 ; USCQ13.20@193.385,89.325 v1@193.385,91.465 ; U10.1@195.3,25.95 195.475,26.125 195.475,29.15 C45.2@195.475,30.75 C45.2@195.45,30.775 ; v1@199.15,69.05 199.15,65.45 200.225,64.375 202.239,64.375 202.239,63.086 203,62.325 C100.2@204.375,62.325 ; USCQ14.20@207.41,89.325 v1@207.41,91.535 ; USCQ15.20@221.46,89.325 v1@221.46,91.515 ; 35.525,73.365 37.575,73.365
  Top Layer w1: CE3.1@8.75,55.075 20.3,55.075 20.9,55.675 20.9,58.625 26.225,58.625 30,62.4 L2.1@30,66.775 ; USB_2.1@10.35,11.375 12.6,11.375 13.9,12.675 13.9,16.475 v1(12.875,17.5) ; C83.2@13.65,33.175 17.425,33.175 v1(17.475,33.125) 28.238,22.362 37.65,22.362 39.1,20.912 39.1,19.812 44.05,19.812 C78.1@44.05,18.312 ; C45.2@195.675,30.8 v1(197.2,30.8) ; v1(221.375,3.15) 221.9,3.15 222.625,3.875 R36.2@223.75,3.875
  Mid-Layer 2 w1: 73.375,72.125 76.5,69 207.325,69 215.975,60.35 ; v1(197.2,30.8) 198.5,32.1 198.5,33 211.25,33 215.975,37.725 215.975,31.8 218.4,29.375 230.025,29.375 236.95,22.45 236.95,8.375 231.675,3.1 v1@221.4,3.1 ; 215.975,37.95 215.975,60.35 ; USB_3.1@230.625,64.65 220.275,64.65 215.975,60.35
  Mid-Layer 2 w2: 30.1,73.625 30.1,76.425 25.577,80.948 25.577,90.352 26.425,91.2 221.225,91.2 v1@221.475,91.45
  Bottom Layer w1: v1@12.825,17.475 17.475,22.125 v1(17.475,33.125) v1(17.475,55.1)
  other v1: 75.725,60.987 73.575,61.112 74.625,61.762 75.7,61.962 72.45,62.762 74.475,62.887 75.6,62.912 75.7,63.937 73.55,64.012 74.525,64.012 72.55,64.037 75.725,64.987 74.575,65.187 73.675,65.212 72.725,65.287 199.175,69.025 28.725,70.325 30.5,70.325 29.7,70.4 31.3,70.4 29.65,71.3 30.525,71.3 31.275,71.3 28.75,71.375 28.725,72.325 31.275,72.325 29.6,72.375 30.45,72.375 30.425,73.275 29.55,73.3 28.675,73.325 31.25,73.35 25.775,91.25 95.525,91.275 53.625,91.375 67.55,91.4 137.475,91.4 123.475,91.425 39.725,91.45 179.45,91.45 193.4,91.45 109.525,91.475 151.375,91.475 81.575,91.5 207.425,91.5 221.45,91.5 165.425,91.55
V6V: C16.2 CA1.1 CE2.1 K8.5 P18.1 U3.2 U11.1@13.725,65.1 | length 211.1
  Top Layer w0.5: CA1.1@136.225,12.3 137.425,12.3 137.7,12.3 138.45,13.05 ; C16.2@138.675,13.05 U3.2@140.425,13.05
  Top Layer w1: CA1.1@137.425,12.3 138.6,11.125 138.6,10.4 142.425,6.575 v1@143.275,6.575
  Mid-Layer 2 w1: P18.1@1.7,43.325 9.55,43.325 11.975,45.75 11.975,56.25 ; v1@143.275,6.525 143.275,6.5 147.873,1.902 232.327,1.902 238.425,8 238.425,15.925 241.275,18.775 241.275,70.45 238.7,73.025 236.425,73.025 235.2,74.25 K8.5@235.2,76.025
  Mid-Layer 2 w3: 8.2,82 11.9,82
  other v1: 143.275,6.55 12.9,60.7 13.725,60.75 14.45,60.75 12.95,61.325 14.45,61.325 13.725,61.35 14.475,62.025 12.975,62.075 13.7,62.075 14.475,62.775 13.7,62.8 12.975,62.825 13.825,63.7 14.55,63.7 12.975,63.725 13.1,80.775 12.025,81.175 13.1,81.75 12.025,82.225 13.05,82.625 12.025,83.3 13.1,83.625
VIN_6V: DC1.1 K8.6 P5.1 P5.2 P5.3 P9.1 P9.2 P10.1 P10.2 P11.1 P11.2 UDLDG1.10 UDLDG2.10 UDLDG3.10 UDLDG4.10 UDLDG5.10 UDLDG6.10 UDLDG7.10 UDLDG8.10 UDLDG9.10 UDLDG10.10 UDLDG11.10 UDLDG12.10 UDLDG13.10 UDLDG14.10 UDLDG15.10 | length 21.4
  Top Layer w0.5: UDLDG1.10@37.16,102.427 v1@37.16,104.235 ; UDLDG2.10@51.135,102.427 v1@51.135,103.89 ; UDLDG3.10@65.01,102.427 v1@65.01,104.065 ; v1@78.96,100.715 UDLDG4.10@78.96,102.452 ; UDLDG5.10@92.935,102.377 v1@92.935,103.8 ; v1@106.96,101.085 UDLDG6.10@106.96,102.377 ; UDLDG7.10@120.985,102.502 v1@120.985,103.81 ; UDLDG8.10@134.885,102.502 v1@134.885,103.915 ; UDLDG9.10@148.91,102.452 v1@148.91,103.84 ; UDLDG10.10@162.86,102.427 v1@162.86,103.765 ; UDLDG11.10@176.835,102.427 v1@176.835,103.84 ; UDLDG12.10@190.885,102.502 v1@190.885,103.74 ; UDLDG13.10@204.81,102.652 v1@204.81,103.99 ; UDLDG14.10@218.76,102.677 v1@218.76,103.94 ; UDLDG15.10@232.835,102.652 v1@232.835,104.035
  other v1: 78.95,100.775 106.95,101.15 190.9,103.725 162.85,103.775 93,103.8 120.975,103.8 148.925,103.825 176.825,103.825 51.125,103.875 134.875,103.9 218.75,103.95 204.825,103.975 232.825,104 65,104.05 37.15,104.2
VREF+: C19.2 CA2.1 U3.6 U5.41 | length 31.1
  Top Layer w0.254: U5.41@134.351,24.997 134.351,22.775 135.285,21.841 140.034,21.841 v1(140.575,21.3) ; v1(143.375,21.4) 147.075,21.4 149.375,19.1 149.375,12.7 148.45,11.775 U3.6@146.061,11.775
  Top Layer w0.3: CA2.1@150.225,11.8 C19.2@152.35,11.8
  Bottom Layer w0.254: v1(140.575,21.3) 143.275,21.3 v1(143.375,21.4) v1@143.45,21.4
WCLOCKRST: DS1.5 U5.198 | length 18.4
  Top Layer w0.254: DS1.5@99.286,25.677 99.309,25.7 103.325,25.7 103.6,25.975 103.6,30.475 104.3,31.175 105.801,31.175 105.803,31.173 108.573,31.173 109.222,31.822 U5.198@112.526,31.822
WCLOCKSCL: DS1.7 U5.195 | length 19.3
  Top Layer w0.254: DS1.7@99.286,28.217 100.842,28.217 101.236,28.611 101.25,28.597 101.25,32.487 104.063,35.3 109.3,35.3 111.278,33.322 U5.195@112.526,33.322
WCLOCKSDA: DS1.6 U5.196 | length 19.8
  Top Layer w0.254: DS1.6@99.286,26.947 100.597,26.947 101.75,28.1 101.75,32.348 104.177,34.775 109.16,34.775 111.113,32.822 U5.196@112.526,32.822
ZDIAN: U5.61
ZFENG: U5.44
pads on no net: *R11.1 *R15.1 C60.1 C62.1 DC1.3 J3. J3.7 J3.8 K8.1 K8.2 K8.3 K8.4 P16.1 U1.40 U2.1 U2.2 U2.3 U2.4 U2.5 U2.6 U2.10 U2.11 U2.14 U2.15 U2.20 U2.21 U2.22 U2.23 U2.24 U2.25 U2.26 U2.27 U2.28 U2.33 U2.34 U2.35 U2.38 U2.39 U2.40 U2.45 U2.46 U2.47 U2.48 U3.1 U3.3 U3.5 U3.7 U3.8 U5.31 U5.47 U5.139 U5.179 U5.192 U9.9 U9.10 U9.11 U9.12 U9.15 U10.3@195.325,22.875 U10.4@195.335,21.405 U10.9 U10.10 U10.11 U10.13 U10.14 U10.15 U10.16 U10.18 U10.19 U10.21 U10.27 U10.28 U10.29 U10.30 U10.31 U10.32 U11.0 U12.0 U20.19 U20.43 U20.46 U30.7 U30.8 U30.9 U30.10 U30.11 U30.12 U30.13 U30.14 U30.15 USB_1.6 USB_1.7 USB_1.8 USB_1.9 USB_1.MH1 USB_1.MH2 USB_2.5 USB_2.6 USB_3.5@233.65,63.725 USB_3.6 X2.1
copper on no net:
  other v1: 33.6,27.412

## Polygon pours and split planes (outlines as drawn)
V6V on Mid-Layer 2 "VDD-No Net" (solid, remove dead copper, pour order 7): 236,75.35 235.95,75.4 235.95,95.4 235.95,95.625 231.425,100.15 231.175,100.4 227.4,100.4 25.7,100.4 22.1,96.8 15.85,96.8 14,94.95 6.725,87.675 6.725,84.225 17.3,84.225 17.95,84.875 20.15,87.075 20.15,88.375 23.2,91.425 26.1,94.325 26.425,94.325 223.5,94.325 225.075,92.75 232.825,85 232.825,79.475 232.825,77.925 233.825,76.925 233.725,76.825 233.725,75.125 235.875,75.125 235.9,75.1 235.95,75.15 235.95,75.325
VIN_6V on Mid-Layer 2 "VDD-No Net" (solid, remove dead copper, pour order 8): 11.525,127.825 11.525,102.025 11.525,99.275 13.25,97.55 15.8,97.55 21.575,97.55 24.975,100.95 231.65,100.95 233.675,98.925 236.681,95.919 236.681,76.075 236.681,75.038 238.037,75.038 239.45,75.038 239.293,76.075 239.4,76.4 239.4,113.225 232.85,119.775 232.85,136.975 20.675,136.975
V3.3V on Mid-Layer 2 "Bottom Layer-No Net" (solid, remove dead copper, pour order 5): 80.6,67.425 205.6,67.425 206.55,67.425 211.675,62.3 213.6,60.375 213.6,30.925 213.6,30.875 216.2,28.275 216.525,27.95 229.875,27.95 233.85,27.95 235.45,26.35 237.75,24.05 237.75,10.975 237.75,7.875 235.65,5.775 232.2,2.325 227.675,2.325 19.8,2.325 17.1,5.025 16.6,5.525 16.6,22.825 17.825,22.825 19.25,24.25 19.375,24.375 23.425,24.375 26.575,24.375 28.725,22.225 28.9,22.05 39.425,22.05 42.725,22.05 45,24.325 48.4,27.725 48.4,33.625 57.45,33.625 59.375,35.55 64.35,40.525 78.8,40.525 79,40.525 82.75,44.275 80.675,46.35 80.675,67.475
GND on Mid-Layer 1 "VDD-No Net" (solid, remove dead copper, pour order 6): 0.575,114.35 9.35,114.35 9.525,114.35 10.375,113.5 10.275,113.4 10.275,96.25 10.275,96.05 12.45,93.875 236.1,93.875 236.95,93.025 239.85,90.125 239.85,89.325 239.85,7.9 239.6,7.65 239.6,7.6 233.15,1.15 10.9,1.15 1.55,10.5 1.55,114.25 1.65,114.35

## Keep-outs
Keep-Out Layer:
  circle w0.1: c4,133.487 r1.75
  circle w0.1: c239.675,133.825 r1.75
  circle w0.1: c3.425,3.4 r1.75
  circle w0.1: c240.225,3.6 r1.75
Mechanical 1:
  lines w0.127: 0,2.35 0,132.487 cw(c5,132.487) 5,137.487 240.625,137.475 ; 2.425,0.025 241.15,-0.075 ; 243.475,95.893 243.6,6.525

## Other copper
Top Layer:
  rectangle net V5V: 28.175,63.825 31.775,74.375
  rectangle net NetD2_2: 18.025,66.2 21.95,75.625
  rectangle net NetD2_2: 12.625,66.15 20.75,67.275
  rectangle net V6V: 12.675,60.425 14.8,65.6
  rectangle net V6V: 6.975,80.225 13.775,84.225
  rectangle net LCDVCC5: 71.075,45.775 74.2,59.625
  rectangle net LCDGND: 67.325,45.925 70.3,59.6
  rectangle net GND: 65.575,60.437 70.475,65.862
  rectangle net V5V: 72,60.537 76.7,65.887
  rectangle net V3.3V: 51.05,64.75 57.475,67.875
  rectangle net GND: 6.3,98.425 10.075,104.425
Mid-Layer 2:
  rectangle net V3.3V: 52.125,32.075 59.9,35.975
  rectangle net V6V: 6.725,83.625 17.35,85.3
  rectangle net V5V: 28.15,69.9 31.9,74.55
  rectangle net V6V: 6.825,55.5 14.9,84.6
  rectangle net V5V: 72,60.537 76.675,67.712
  rectangle net V5V: 31.5,70.5 76.675,74.45
  rectangle net V5V: 72,67.325 76.675,71.825
  rectangle net V3.3V: 52.425,32.8 59.425,67.825
  rectangle net VIN_6V: 236.7,74.975 239.35,77.275
  rectangle net V6V: 233.925,74.975 236.075,77.125
  rectangle net VIN_6V: 12.1,98.425 16.6,104.825
  rectangle net VIN_6V: 204.5,132.05 216.85,136.875
  rectangle net VIN_6V: 134,133.35 145.475,137.025
  rectangle net VIN_6V: 39.975,132.025 51.5,136.975
  rectangle net VIN_6V: 11.525,97.75 17.7,106.15
  rectangle net VIN_6V: 236.675,76.625 239.4,79.125
  rectangle net V6V: 233.35,77.35 236.025,77.975
Bottom Layer:
  rectangle net LCDGND: 67.425,23.787 70.425,51.987
  rectangle net LCDGND: 70.2,44.387 72.175,45.637
  rectangle net LCDGND: 70.275,40.387 72.175,41.637
  rectangle net LCDGND: 70.2,35.412 72.175,37.137
  rectangle net LCDGND: 70.175,32.387 72.175,32.637
  rectangle net LCDVCC5: 71,45.912 74.15,51.987

## Silkscreen, mask and mechanical layers (free items; w line width, h text height)
Top Overlay:
  circle w0.1: c239.65,133.85 r3
  circle w0.1: c240.175,3.575 r3
  circle w0.1: c4,133.487 r3
  lines w0.1: 6.407,3.73 ccw(c3.425,3.4) 6.425,3.4
  lines w0.5: 65,7.487 65,67.487
  text "MRXXJ_V6.01" at 151.7,128.575 h2.5
  text "2020-04-20" at 118.65,128 h3
  text "NRST" at 97.5,62.462 h1 r90
  text "SWCLK" at 98.976,62.482 h1 r90
  text "SWDIO" at 100.45,62.437 h1 r90
  text "GND" at 101.85,62.362 h1 r90
  text "3.3V" at 103.25,62.312 h1 r90
  text "BOOT0" at 55.075,26.537 h1
  text "BOOT1" at 44.925,26.462 h1
  text "TXD2" at 150.75,13.812 h1 r270
  text "GND" at 155.9,13.712 h1 r270
  text "RXD2" at 153.3,13.612 h1 r270
  text "GND" at 19.525,12.687 h1 r90
  text "KEY2" at 21.925,12.662 h1 r90
Mechanical 1:
  lines w0.127: 0.025,2.4 ccw(c2.375,2.4) 2.375,0.05
  lines w0.15: 240.475,137.475 cw(c240.525,134.625) 243.375,134.675 ; 241.125,-0.075 242.25,-0.075 ccw(c242.25,1.275) 243.6,1.275 ; 243.375,134.775 243.475,95.875 ; 243.6,1.2 243.6,6.625

## Text inside footprints (layer, text, board x,y; h text height)
BOOT: Top Overlay "GND" at 51.2,23.375 h1; Top Overlay "3.3V" at 50.75,32.65 h1
BT1: Top Overlay "+" at 78.943,14.829 h1 r180
PLCD1: Bottom Overlay "1" at 73.368,46.654 h1 r90; Bottom Overlay "40" at 73.353,27.716 h1 r90